# Altium PCB PCB-sac-xa-4s.pcbdoc
Units mm, origin at the board's own origin, x right, y up, seen from the top; angles counter-clockwise.
Board outline 48.9 x 43.1 mm, 2 copper layers (Top Layer, Bottom Layer); 87 components, 52 nets, 582 pads, 32 vias.
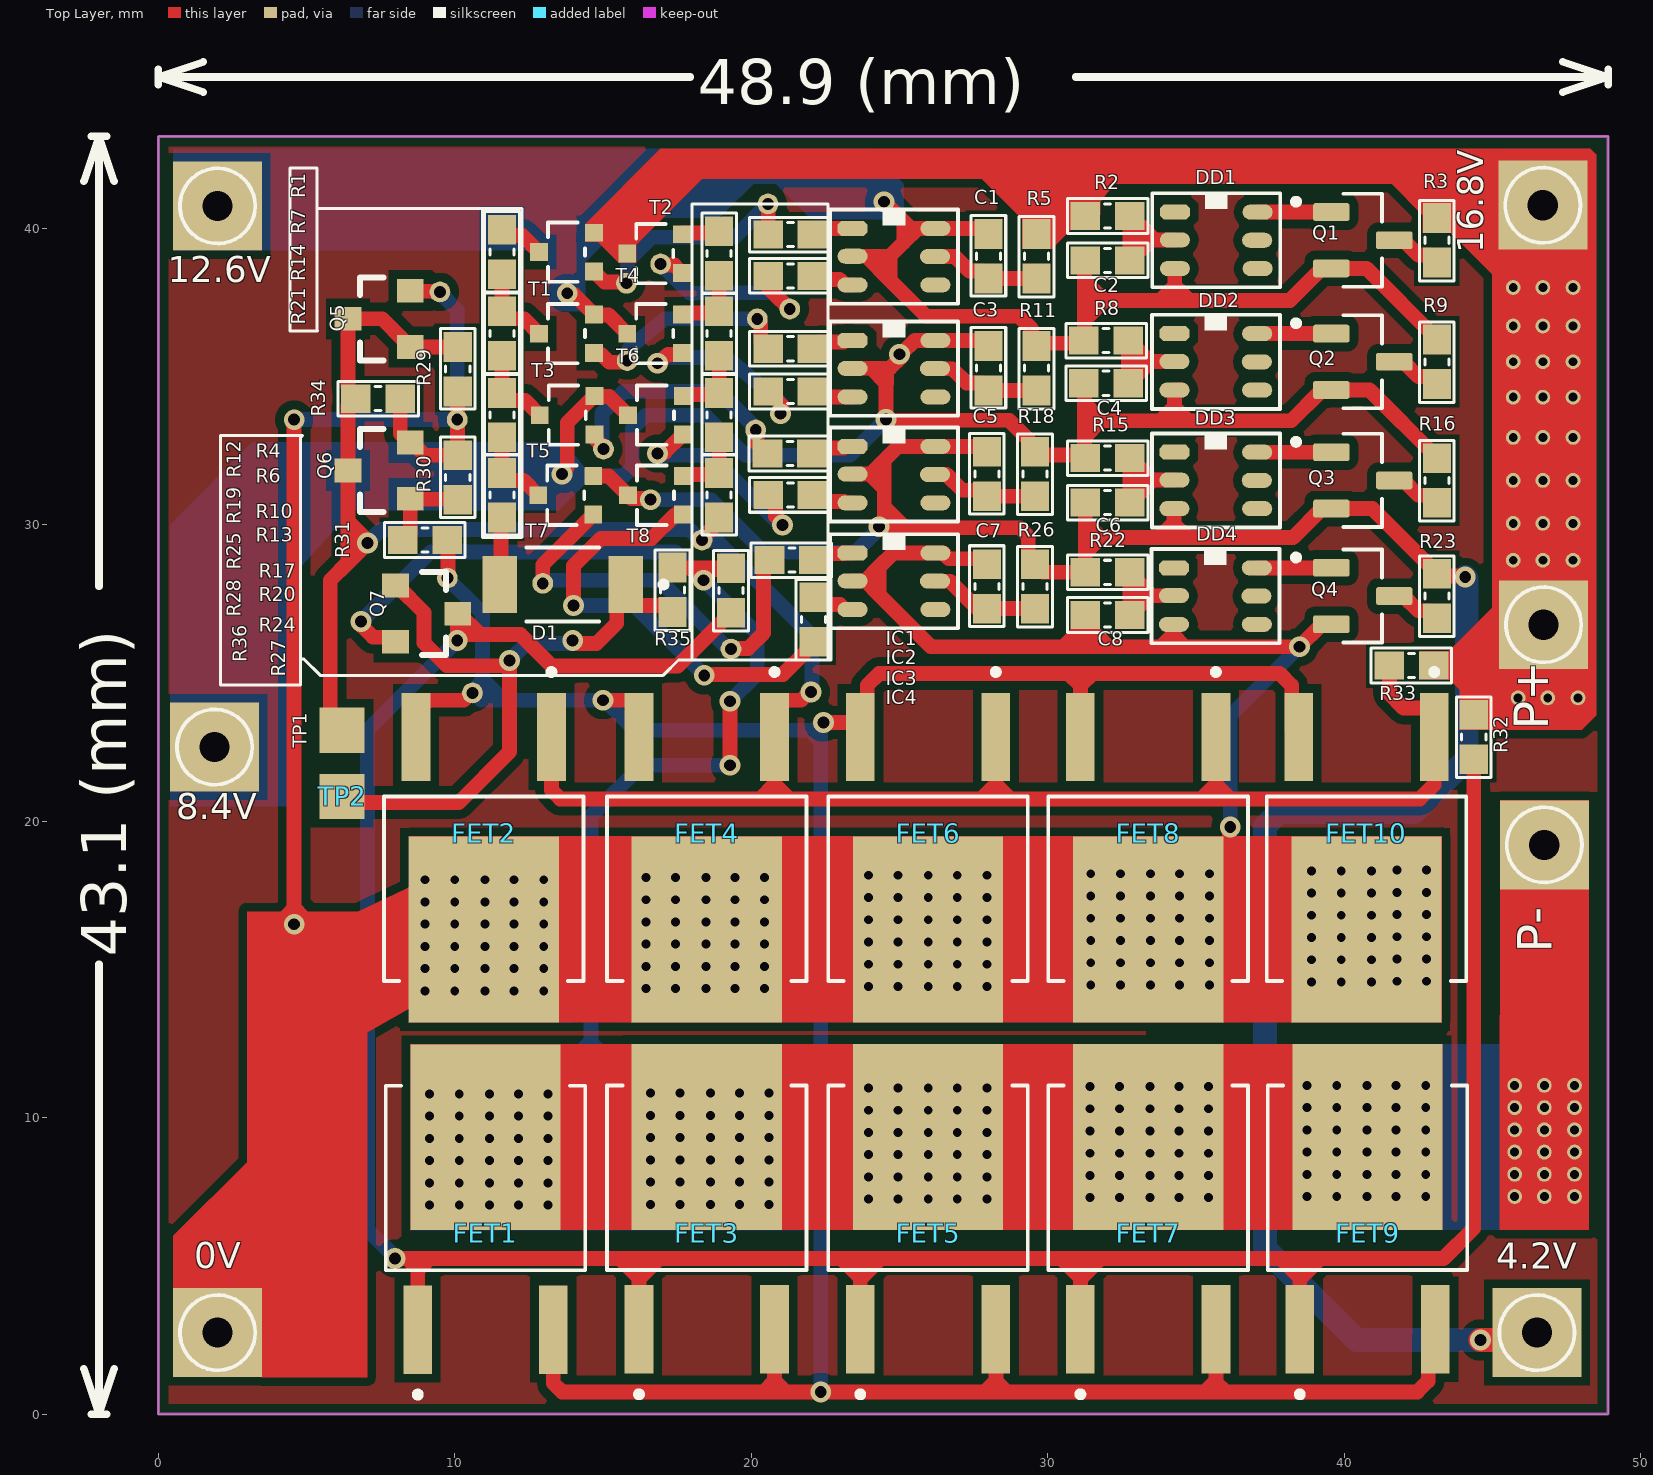
[diagram p0: Top Layer view]
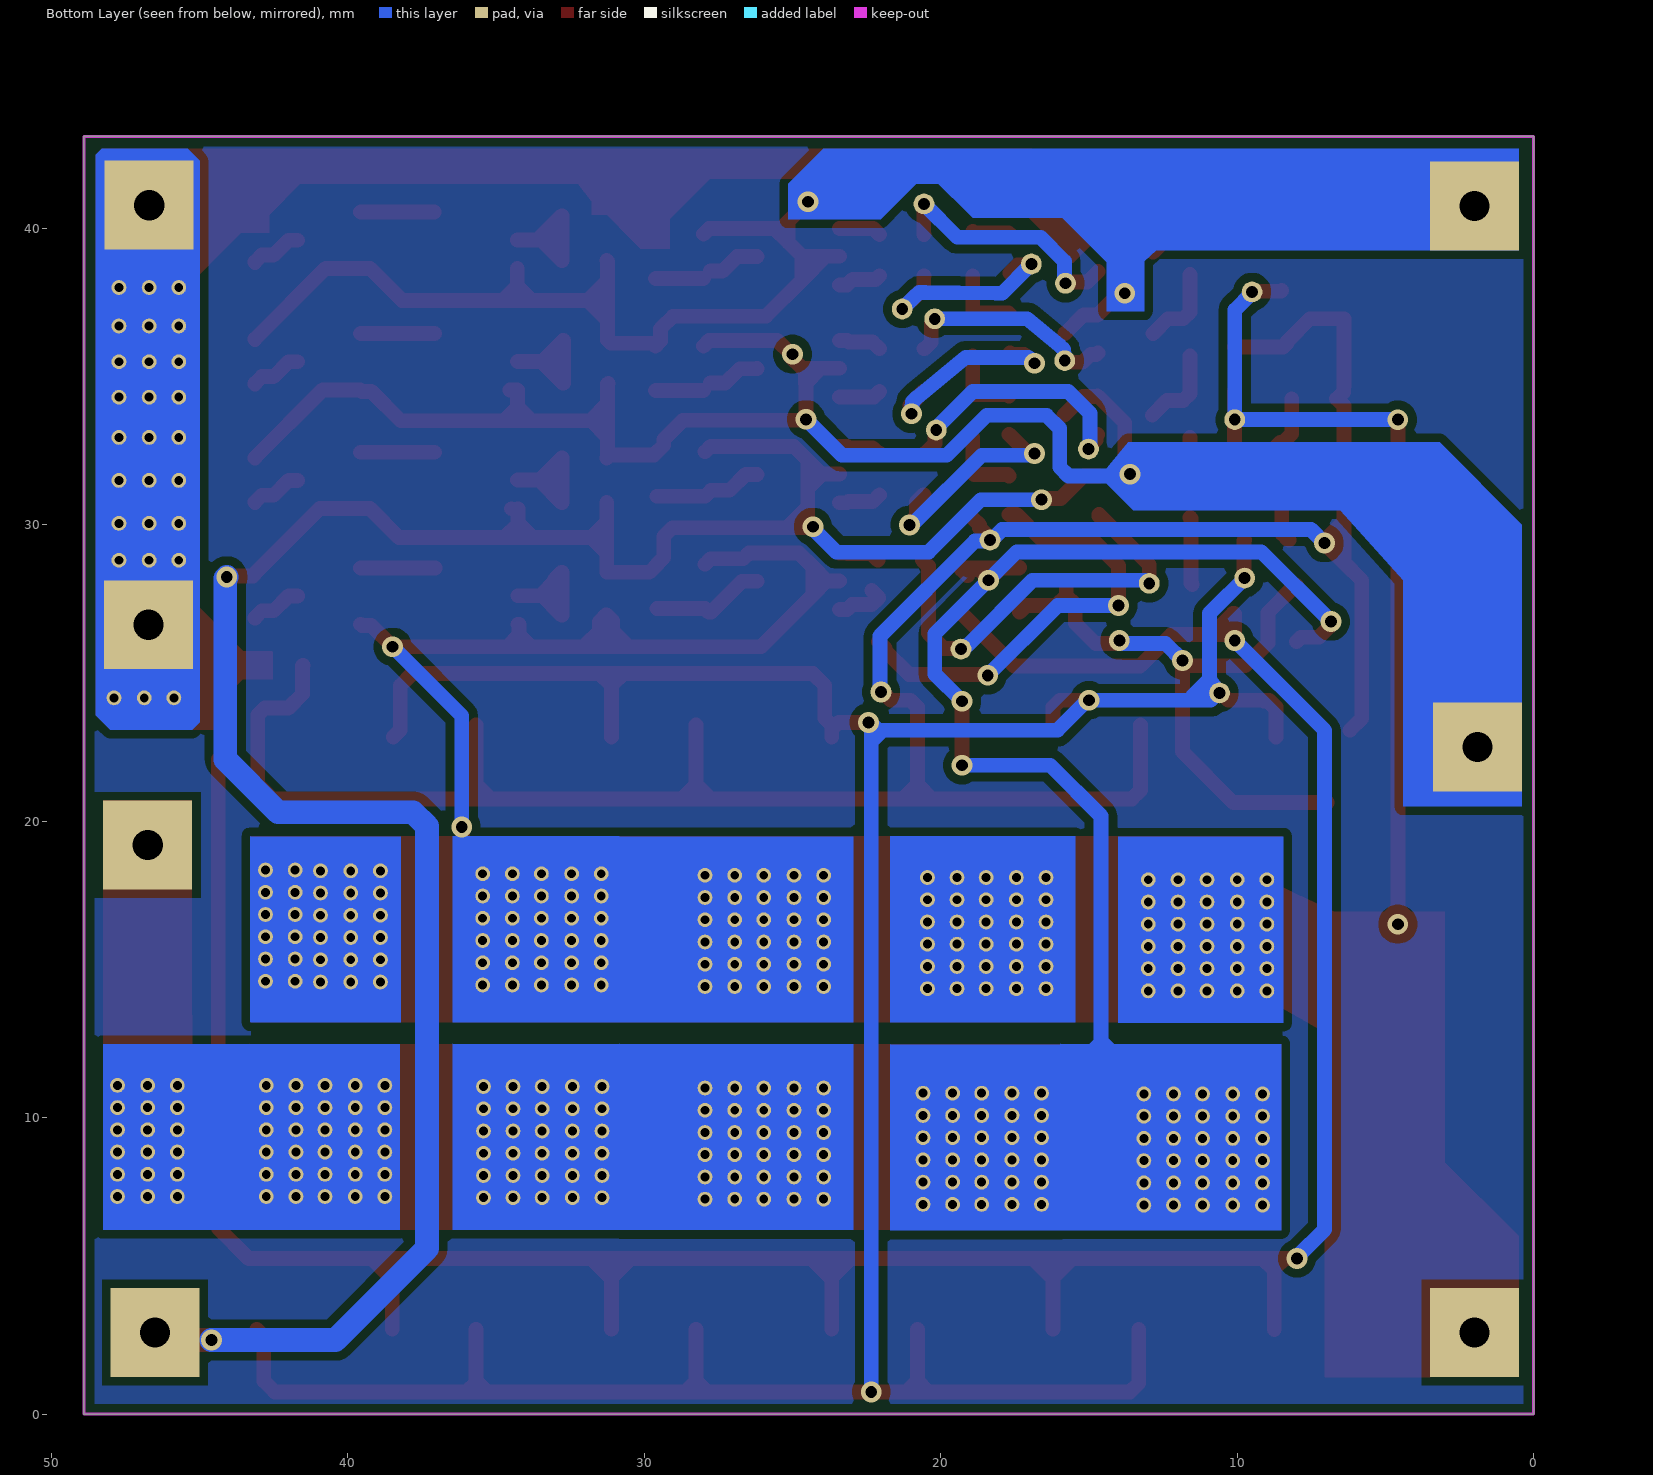
[diagram p1: Bottom Layer view, seen from below]
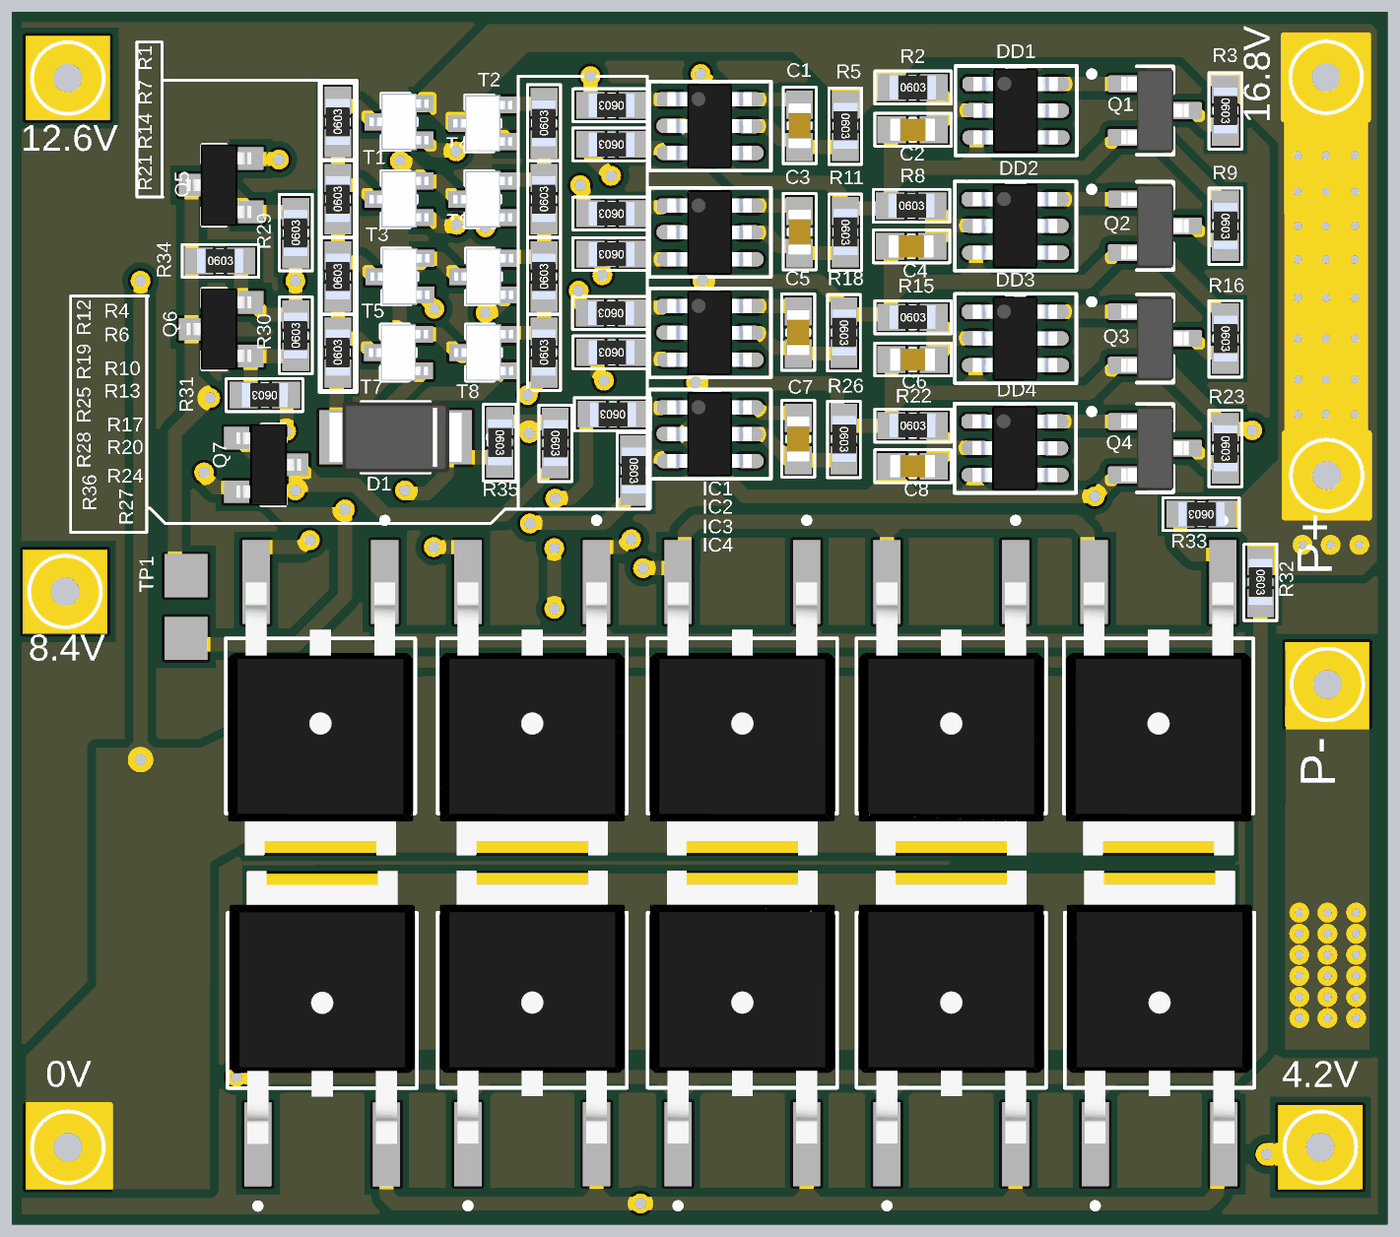
[diagram p2: 3D render of the assembled board from above, using the file's embedded part models]

## Layer stack, top to bottom
Top Solder: solder mask 0.0102, Solder Resist, Dk 3.5
Top Layer: signal copper 0.0356
Dielectric 1: dielectric 0.32, FR-4, Dk 4.8
Bottom Layer: signal copper 0.0356
Bottom Solder: solder mask 0.0102, Solder Resist, Dk 3.5

## Board outline
0,0 48.9,0 48.9,43.1 0,43.1

## Design rules (kind name [scope] priority, off if disabled: settings)
Clearance [All] p1: gap=0.254 ignorepadtopadclearanceinfootprint=FALSE except(0: Arc-Hole Track-Hole SMDPad-Hole THPad-Hole Via-Hole Fill-Hole Poly-Hole Region-Hole Text-Hole; 0.3: Arc-Fill Arc-Poly Arc-Region Track-Fill Track-Poly Track-Region SMDPad-Fill SMDPad-Poly SMDPad-Region THPad-Fill THPad-Poly THPad-Region Via-Fill Via-Poly Via-Region Fill-Fill Fill-Poly Fill-Region Poly-Poly Poly-Region Region-Region)
ComponentClearance ComponentClearance_1 [All] p1: gap=0.5 collisioncheckmode=3 verticalgap=0.254 showdistances=FALSE
PolygonConnect [All] p1: connectstyle=Relief reliefconductorwidth=0.254 reliefentries=4 polygonreliefangle="90 Angle" airgapwidth=0.254
RoutingVias [All] p1: holewidth=0.4 width=0.7 viastyle="Through Hole" minholewidth=0.4 minwidth=0.7 maxholewidth=0.4 maxwidth=0.7
SolderMaskExpansion [All] p1: expansion=0.102 istentingtop=FALSE
Width [All] p1: maxlimit=3 minlimit=0.3 preferedwidth=0.5
29 further rules are at their usual default settings.

## Classes and differential pairs
component class "Room Definition 1": C1 DD4 IC4

## Components (designator, comment, footprint, x,y, rotation, side; value= is the part's Value field where it differs from the comment)
0V "5003" KEYSTONE_5003#1 2,2.75 r0 top
4.2V "5003" KEYSTONE_5003#1 46.5,2.75 r0 top
8.4V "5003" KEYSTONE_5003#1 1.9,22.5 r0 top
12.6V "5003" KEYSTONE_5003#1 2,40.75 r0 top
16.8V "5003" KEYSTONE_5003#1 46.7,40.775 r90 top
C1 "C" "tu 0603" 28,39.053 r90 top
C2 "C" "tu 0603" 32.016,38.913 r0 top
C3 "C" "tu 0603" 28,35.278 r90 top
C4 "C" "tu 0603" 31.965,34.769 r0 top
C5 "C" "tu 0603" 27.949,31.707 r90 top
C6 "C" "tu 0603" 32.015,30.744 r0 top
C7 "C" "tu 0603" 27.949,27.917 r90 top
C8 "C" "tu 0603" 32.015,26.954 r0 top
D1 "SS34FSH" SODFL4725X110N 13.643,27.983 r180 top
DD1 "HY2213" SOT23-6 35.796,39.721 r0 top
DD2 "HY2213" SOT23-6 35.781,35.621 r0 top
DD3 "HY2213" SOT23-6 35.781,31.621 r0 top
DD4 "HY2213" SOT23-6 35.766,27.721 r0 top
FET1 "AOD472" PCBComponent_1 11.036,9.34 r0 top
FET2 "AOD472" PCBComponent_1 10.975,16.35 r180 top
FET3 "AOD472" PCBComponent_1 18.5,9.35 r0 top
FET4 "AOD472" PCBComponent_1 18.5,16.35 r180 top
FET5 "AOD472" PCBComponent_1 25.964,9.35 r0 top
FET6 "AOD472" PCBComponent_1 25.964,16.35 r180 top
FET7 "AOD472" PCBComponent_1 33.387,9.35 r0 top
FET8 "AOD472" PCBComponent_1 33.386,16.35 r180 top
FET9 "AOD472" PCBComponent_1 40.787,9.35 r0 top
FET10 "AOD472" PCBComponent_1 40.75,16.35 r180 top
IC1 "DW01A" SOT23-6 24.927,39.17 r0 top
IC2 "DW01A" SOT23-6 24.927,35.39 r0 top
IC3 "DW01A" SOT23-6 24.927,31.82 r0 top
IC4 "DW01A" SOT23-6 24.927,28.22 r0 top
P+ "5003" KEYSTONE_5003#2 46.725,26.625 r90 top (schematic designator PACK+)
P- "5003" KEYSTONE_5003#3 46.75,19.2 r90 top (schematic designator PACK-)
Q1 "BSS138" SOT95P240X111-3N 40.626,39.594 r0 top
Q2 "BSS138" SOT95P240X111-3N 40.626,35.494 r0 top
Q3 "BSS138" SOT95P240X111-3N 40.626,31.494 r0 top
Q4 "BSS138" SOT95P240X111-3N 40.626,27.594 r0 top
Q5 "MMBT5551" SOT23-3 7.5,36.943 r0 top
Q6 "MMBT5551" SOT23-3 7.5,31.825 r0 top
Q7 "MMBT5551" SOT23-3 9,27 r180 top
R1 "R" "tro smd 0603" 11.593,39.193 r90 top
R2 "R" "tro smd 0603" 32.016,40.413 r0 top
R3 "R" "tro smd 0603" 43.126,39.594 r270 top
R4 "R" "tro smd 0603" 21.318,39.783 r180 top
R5 "R" "tro smd 0603" 29.621,39.053 r270 top
R6 "R" "tro smd 0603" 21.318,38.393 r180 top
R7 "R" "tro smd 0603" 11.593,36.443 r90 top
R8 "R" "tro smd 0603" 31.965,36.209 r0 top
R9 "R" "tro smd 0603" 43.126,35.494 r270 top
R10 "R" "tro smd 0603" 21.318,35.933 r180 top
R11 "R" "tro smd 0603" 29.621,35.278 r270 top
R12 "R" "tro smd 0603" 18.918,39.143 r90 top
R13 "R" "tro smd 0603" 21.318,34.493 r180 top
R14 "R" "tro smd 0603" 11.593,33.693 r90 top
R15 "R" "tro smd 0603" 32.015,32.244 r0 top
R16 "R" "tro smd 0603" 43.126,31.494 r270 top
R17 "R" "tro smd 0603" 21.3,32.4 r180 top
R18 "R" "tro smd 0603" 29.57,31.707 r270 top
R19 "R" "tro smd 0603" 18.918,36.443 r90 top
R20 "R" "tro smd 0603" 21.318,31.003 r180 top
R21 "R" "tro smd 0603" 11.593,30.993 r90 top
R22 "R" "tro smd 0603" 32.015,28.394 r0 top
R23 "R" "tro smd 0603" 43.126,27.594 r270 top
R24 "R" "tro smd 0603" 21.368,28.803 r180 top
R25 "R" "tro smd 0603" 18.918,33.693 r90 top
R26 "R" "tro smd 0603" 29.57,27.917 r270 top
R27 "R" "tro smd 0603" 22.1,26.803 r270 top
R28 "R" "tro smd 0603" 18.918,30.993 r90 top
R29 "R" "tro smd 0603" 10.1,35.243 r90 top
R30 "R" "tro smd 0603" 10.1,31.593 r90 top
R31 "R" "tro smd 0603" 9,29.483 r180 top
R32 "R" "tro smd 0603" 44.37,22.84 r270 top
R33 "R" "tro smd 0603" 42.275,25.25 r180 top
R34 "R" "tro smd 0603" 7.41,34.25 r0 top
R35 "R" "tro smd 0603" 17.343,27.803 r270 top
R36 "R" "tro smd 0603" 19.318,27.778 r270 top
T1 "PMST5401" SOT323 13.768,39.193 r90 top
T2 "PMST5401" SOT323 16.743,39.143 r90 top
T3 "PMST5401" SOT323 13.768,36.443 r90 top
T4 "PMST5401" SOT323 16.743,36.443 r90 top
T5 "PMST5401" SOT323 13.793,33.693 r90 top
T6 "PMST5401" SOT323 16.768,33.693 r90 top
T7 "PMST5401" SOT323 13.743,30.993 r90 top
T8 "PMST5401" SOT323 16.768,30.993 r90 top
TP1 "TP?" TP 6.2,23.064 r0 top
TP2 "TP?" TP 6.2,20.836 r90 top

## Footprints (in the part's own frame and the unit in brackets; to place one, negate y for a bottom-side part, rotate by r counter-clockwise, add the part's x,y. Pads: shape width x height; smd on the part's side, far side on the other; paste and mask are expansions set on the pad)
KEYSTONE_5003#1 [mm]
  rect 3x3 hole 1.02: TP(0,0)
  silkscreen extent -1.27,-1.27 1.27,1.27
KEYSTONE_5003#2 [mm]
  rect 3x3 hole 1.02: PACK+(0,0)
  silkscreen extent -1.27,-1.27 1.27,1.27
KEYSTONE_5003#3 [mm]
  rect 3x3 hole 1.02: PACK-(0,0)
  silkscreen extent -1.27,-1.27 1.27,1.27
PCBComponent_1 [mm]
  rect 0.97x2.98 smd: 1(-2.286,-6.49) 3(2.286,-6.49)
  rect 5.07x6.27 smd paste-4: 2(0,0)
  silkscreen extent -3.37,-8.78 3.37,1.74, body extent -3.29,-6.47 3.29,3.23, height 2.3
SODFL4725X110N [mm]
  rect 1.17x1.92 smd: A(2.125,0) C(-2.125,0)
  silkscreen extent -3.5,-1.25 1.22,1.25, body extent -2.35,-1.25 2.35,1.25, height 1.1
SOT23-3 [mm]
  rect 0.9x0.8 smd: 1(1,-0.95) 2(1,0.95) 3(-1.1,0)
  silkscreen extent -0.7,-1.4 0.1,1.4, body extent -1.28,-1.45 1.02,1.45, height 1
SOT23-6 [mil]
  oct 40x20 smd: 1(-59.41,32.4)
  oval 40x20 smd: 2(-59.41,-4.6) 3(-59.41,-42.6) 4(50.59,-42.6) 5(50,-5) 6(50.59,32.4)
  silkscreen extent -89,-68 81,57, body extent -64,-64 54,54, height 51
SOT95P240X111-3N [mm]
  rrect25% 1.23x0.6 smd: 1(-1.06,0.95) 2(-1.06,-0.95) 3(1.06,0)
  silkscreen extent -2.35,-1.57 0.65,1.57, body extent -1.2,-1.46 1.2,1.46, height 1.13
SOT323 [mm]
  rect 0.6x0.6 smd: 1(-0.65,-0.925) 2(0.65,-0.925) 3(0,0.925)
  silkscreen extent -1,-0.63 1,0.63, body extent -1,-1.05 1,1.05, height 0.9
TP [mil]
  rect 60x60 smd: 1(0,0)
"tro smd 0603" [mm] "Chip Capacitor, 2-Leads, Body 1,60x0,80mm, IPC Medium Density"
  rect 1x0.95 smd mask+0.076: 1(-0.75,0) 2(0.75,0)
  silkscreen extent -1.35,-0.58 1.37,0.58, body extent -0.82,-0.42 0.82,0.43, height 0.44
"tu 0603" [mm] "Chip Capacitor, 2-Leads, Body 1,60x0,80mm, IPC Medium Density"
  rect 1x0.95 smd mask+0.076: 1(-0.75,0) 2(0.75,0)
  silkscreen extent -1.35,-0.58 1.37,0.58, body extent -0.8,-0.4 0.8,0.4, height 0.9

## Part data
0V 4.2V 8.4V 12.6V 16.8V P+ P-: Package=None, Availability=Unavailable, MF="{'manufacturer': u'Keystone Electronics'}", MP=5003, Price=None
C1 C2 C3 C4 C5 C6 C7 C8: library part "Tu 0603 105 50V 10%", "Dán", Chung_Loai=Dán, Don_Vi=Con, Ma_Hang=MH004569, So_Chan=2, Ten_Linh_Kien="Tụ 0603 105-1uF 50V 10%"
D1: "3A, 40V, Schottky Rectifier", Package="SOD-128-2 Taiwan Semiconductor", Availability="In Stock", Check_prices=https://www.snapeda.com/parts/SS34FSH/Taiwan+Semiconductor/view-part/?ref=eda, MF="Taiwan Semiconductor", MP=SS34FSH, Price=None, SnapEDA_Link=https://www.snapeda.com/parts/SS34FSH/Taiwan+Semiconductor/view-part/?ref=snap
DD1 DD2 DD3 DD4: "1 Cell Li-ion/Polymer Battery Charge Balance IC"
IC1 IC2 IC3 IC4: "One Cell Lithium-ion/Polymer Battery Protection IC", Package="SOT-23-6 Fortune Semiconductor", Availability="Not in stock", Check_prices=https://www.snapeda.com/parts/DW01A/Fortune+Semiconductor/view-part/?ref=eda, MF="Fortune Semiconductor", MP=DW01A, Price=None, SnapEDA_Link=https://www.snapeda.com/parts/DW01A/Fortune+Semiconductor/view-part/?ref=snap
Q1 Q2 Q3 Q4: "N-Channel 50V 220mA (Ta) 360mW (Ta) Surface Mount SOT-23-3", Package="SOT-23 ON Semiconductor", Availability=Good, Check_prices=https://www.snapeda.com/parts/BSS138/ON%20Semiconductor/view-part/4794929/?ref=eda, MF="ON Semiconductor", MP=BSS138, Price=None, Purchase-URL=https://pricing.snapeda.com/search/part/BSS138/?ref=eda, SnapEDA_Link=https://www.snapeda.com/parts/BSS138/ON%20Semiconductor/view-part/4794929/?ref=snap
Q5 Q6 Q7: "Bipolar _BJT_ Transistor NPN 160V 600mA 225mW Surface Mount SOT-23-3 _TO-236_", Package="SOT-23-3 MCC", Availability=Unavailable, MF="ON Semiconductor", MP=MMBT5551, Price=None, SnapEDA_Link=https://www.snapeda.com/parts/MMBT5551/ON%20Semiconductor/view-part/2760073/?ref=snap
R1 R2 R3 R4 R5 R6 R7 R8 R9 R10 R11 R12 R13 R14 R15 R16 R17 R18 R19 R20 R21 R22 R23 R24 R25 R26 R27 R28 R29 R30 R31 R32 R33 R34 R35 R36: library part "Tro 0603 5% 100R", "Dán", Chung_Loai=Dán, Don_Vi=Con, Ma_Hang=MH006315, So_Chan=2, Ten_Linh_Kien="Trở 0603 5% 100R"
T1 T2 T3 T4 T5 T6 T7 T8: "<p> <author>AAL Eindhoven MK</author><hr><p> <img src=\"http://www.nxp.com/img/NXP_logo.png\">", Package=None, Availability=Unavailable, MP=PMST5401, Price=None

## Free pads (board coordinates)
  round 0.7 hole 0.4: 2(9.5,37.85) 2(9.75,28.199) 2(10.084,33.543) 2(10.596,24.324) 2(12.968,28.02) 2(15.018,32.55) 2(15.793,38.143) 2(15.818,35.533) 2(16.945,38.793) 2(18.338,29.483) 2(19.318,25.803) 2(20.151,33.193) 2(20.205,36.943) 2(20.564,40.817) 2(21.3,37.275)
  round 0.5 hole 0.3: 3(9,14.275) 3(9.15,7.05) 3(12,14.275) 3(12.15,7.05) 3(13,14.275) 3(13.15,7.05) 3(16.45,14.35) 3(16.6,7.075) 3(19.45,14.35) 3(19.6,7.075) 3(20.45,14.35) 3(20.6,7.075) 3(23.95,7.25) 3(23.95,14.425) 3(26.95,7.25) 3(26.95,14.425) 3(27.95,7.25) 3(27.95,14.425) 3(31.425,7.3) 3(31.45,14.475) 3(34.425,7.3) 3(34.45,14.475) 3(35.425,7.3) 3(35.45,14.475) 3(38.75,7.338) 3(38.9,14.575) 3(41.75,7.338) 3(41.775,14.6) 3(42.75,7.338) 3(45.75,7.338) 4(10,14.275) 4(10.15,7.05) 4(17.45,14.35) 4(17.6,7.075) 4(24.95,7.25) 4(24.95,14.425) 4(32.425,7.3) 4(32.45,14.475) 4(39.75,7.338) 4(39.9,14.575) 4(42.775,14.6) 4(46.75,7.338) 5(11.02,14.275) 5(11.17,7.05) 5(18.47,14.35) 5(18.62,7.075) 5(25.97,7.25) 5(25.97,14.425) 5(33.445,7.3) 5(33.47,14.475) 5(40.77,7.338) 5(40.92,14.575) 5(47.77,7.338) 6(9,15.025) 6(9.15,7.8) 6(12,15.025) 6(12.15,7.8) 6(13,15.025) 6(13.15,7.8) 6(16.45,15.1) 6(16.6,7.825) 6(19.45,15.1) 6(19.6,7.825) 6(20.45,15.1) 6(20.6,7.825) 6(23.95,8) 6(23.95,15.175) 6(26.95,8) 6(26.95,15.175) 6(27.95,8) 6(27.95,15.175) 6(31.425,8.05) 6(31.45,15.225) 6(34.425,8.05) 6(34.45,15.225) 6(35.425,8.05) 6(35.45,15.225) 6(38.75,8.088) 6(38.9,15.325) 6(41.75,8.088) 6(41.775,15.35) 6(42.75,8.088) 6(45.75,8.088) 7(10,15.025) 7(10.15,7.8) 7(17.45,15.1) 7(17.6,7.825) 7(24.95,8) 7(24.95,15.175) 7(32.425,8.05) 7(32.45,15.225) 7(39.75,8.088) 7(39.9,15.325) 7(42.775,15.35) 7(46.75,8.088) 8(11.02,15.025) 8(11.17,7.8) 8(18.47,15.1) 8(18.62,7.825) 8(25.97,8) 8(25.97,15.175) 8(33.445,8.05) 8(33.47,15.225) 8(40.77,8.088) 8(40.92,15.325) 8(47.77,8.088) 9(9,15.775) 9(9.15,8.55) 9(12,15.775) 9(12.15,8.55) 9(13,15.775) 9(13.15,8.55) 9(16.45,15.85) 9(16.6,8.575) 9(19.45,15.85) 9(19.6,8.575) 9(20.45,15.85) 9(20.6,8.575) 9(23.95,8.75) 9(23.95,15.925) 9(26.95,8.75) 9(26.95,15.925) 9(27.95,8.75) 9(27.95,15.925) 9(31.425,8.8) 9(31.45,15.975) 9(34.425,8.8) 9(34.45,15.975) 9(35.425,8.8) 9(35.45,15.975) 9(38.75,8.838) 9(38.9,16.075) 9(41.75,8.838) 9(41.775,16.1) 9(42.75,8.838) 9(45.75,8.838) 10(10,15.775) 10(10.15,8.55) 10(17.45,15.85) 10(17.6,8.575) 10(24.95,8.75) 10(24.95,15.925) 10(32.425,8.8) 10(32.45,15.975) 10(39.75,8.838) 10(39.9,16.075) 10(42.775,16.1) 10(46.75,8.838) 11(11.02,15.775) 11(11.17,8.55) 11(18.47,15.85) 11(18.62,8.575) 11(25.97,8.75) 11(25.97,15.925) 11(33.445,8.8) 11(33.47,15.975) 11(40.77,8.838) 11(40.92,16.075) 11(47.77,8.838) 12(9,16.525) 12(9.15,9.3) 12(12,16.525) 12(12.15,9.3) 12(13,16.525) 12(13.15,9.3) 12(16.45,16.6) 12(16.6,9.325) 12(19.45,16.6) 12(19.6,9.325) 12(20.45,16.6) 12(20.6,9.325) 12(23.95,9.5) 12(23.95,16.675) 12(26.95,9.5) 12(26.95,16.675) 12(27.95,9.5) 12(27.95,16.675) 12(31.425,9.55) 12(31.45,16.725) 12(34.425,9.55) 12(34.45,16.725) 12(35.425,9.55) 12(35.45,16.725) 12(38.75,9.588) 12(38.9,16.825) 12(41.75,9.588) 12(41.775,16.85) 12(42.75,9.588) 12(45.75,9.588) 13(10,16.525) 13(10.15,9.3) 13(17.45,16.6) 13(17.6,9.325) 13(24.95,9.5) 13(24.95,16.675) 13(32.425,9.55) 13(32.45,16.725) 13(39.75,9.588) 13(39.9,16.825) 13(42.775,16.85) 13(46.75,9.588) 14(11.02,16.525) 14(11.17,9.3) 14(18.47,16.6) 14(18.62,9.325) 14(25.97,9.5) 14(25.97,16.675) 14(33.445,9.55) 14(33.47,16.725) 14(40.77,9.588) 14(40.92,16.825) 14(47.77,9.588) 15(9,17.275) 15(9,18.025) 15(9.15,10.05) 15(9.15,10.8) 15(12,17.275) 15(12,18.025) 15(12.15,10.05) 15(12.15,10.8) 15(13,17.275) 15(13,18.025) 15(13.15,10.05) 15(13.15,10.8) 15(16.45,17.35) 15(16.45,18.1) 15(16.6,10.075) 15(16.6,10.825) 15(19.45,17.35) 15(19.45,18.1) 15(19.6,10.075) 15(19.6,10.825) 15(20.45,17.35) 15(20.45,18.1) 15(20.6,10.075) 15(20.6,10.825) 15(23.95,10.25) 15(23.95,11) 15(23.95,17.425) 15(23.95,18.175) 15(26.95,10.25) 15(26.95,11) 15(26.95,17.425) 15(26.95,18.175) 15(27.95,10.25) 15(27.95,11) 15(27.95,17.425) 15(27.95,18.175) 15(31.425,10.3) 15(31.425,11.05) 15(31.45,17.475) 15(31.45,18.225) 15(34.425,10.3) 15(34.425,11.05) 15(34.45,17.475) 15(34.45,18.225) 15(35.425,10.3) 15(35.425,11.05) 15(35.45,17.475) 15(35.45,18.225) 15(38.75,10.338) 15(38.75,11.088) 15(38.9,17.575) 15(38.9,18.325) 15(41.75,10.338) 15(41.75,11.088) 15(41.775,17.6) 15(41.775,18.35) 15(42.75,10.338) 15(42.75,11.088) 15(45.7,28.8) 15(45.7,30.044) 15(45.7,31.494) 15(45.7,32.944) 15(45.7,34.3) 15(45.7,35.494) 15(45.7,36.7) 15(45.7,38) 15(45.75,10.338) 15(45.75,11.088) 15(45.866,24.159) 16(10,17.275) 16(10,18.025) 16(10.15,10.05) 16(10.15,10.8) 16(17.45,17.35) 16(17.45,18.1) 16(17.6,10.075) 16(17.6,10.825) 16(24.95,10.25) 16(24.95,11) 16(24.95,17.425) 16(24.95,18.175) 16(32.425,10.3) 16(32.425,11.05) 16(32.45,17.475) 16(32.45,18.225) 16(39.75,10.338) 16(39.75,11.088) 16(39.9,17.575) 16(39.9,18.325) 16(42.775,17.6) 16(42.775,18.35) 16(46.7,28.8) 16(46.7,30.044) 16(46.7,31.494) 16(46.7,32.944) 16(46.7,34.3) 16(46.7,35.494) 16(46.7,36.7) 16(46.7,38) 16(46.75,10.338) 16(46.75,11.088) 16(46.866,24.159) 17(11.02,17.275) 17(11.02,18.025) 17(11.17,10.05) 17(11.17,10.8) 17(18.47,17.35) 17(18.47,18.1) 17(18.62,10.075) 17(18.62,10.825) 17(25.97,10.25) 17(25.97,11) 17(25.97,17.425) 17(25.97,18.175) 17(33.445,10.3) 17(33.445,11.05) 17(33.47,17.475) 17(33.47,18.225) 17(40.77,10.338) 17(40.77,11.088) 17(40.92,17.575) 17(40.92,18.325) 17(47.72,28.8) 17(47.72,30.044) 17(47.72,31.494) 17(47.72,32.944) 17(47.72,34.3) 17(47.72,35.494) 17(47.72,36.7) 17(47.72,38) 17(47.77,10.338) 17(47.77,11.088) 17(47.886,24.159)

## Via types
v1: diameter 0.7, hole 0.4, Top Layer to Bottom Layer, 32 vias

## Nets (pads, with @x,y where several pads share a name; then routed paths per layer and width w, separated by ;. In a path a pad name is that pad's centre, name@x,y a point inside that pad or via, vN(x,y) a via of type N, cw(c..) or ccw(c..) an arc to the next point about the centre after c; other vN are vias at no path point)
Net0V_TP: 0V.TP C7.2 C8.1 DD4.3 FET2.2 FET4.2 FET6.2 FET8.2 FET10.2 IC4.2 IC4.6 pad.2@9.5,37.85 pad.2@10.084,33.543 pad.3@9,14.275 pad.3@12,14.275 pad.3@13,14.275 pad.3@16.45,14.35 pad.3@19.45,14.35 pad.3@20.45,14.35 pad.3@23.95,14.425 pad.3@26.95,14.425 pad.3@27.95,14.425 pad.3@31.45,14.475 pad.3@34.45,14.475 pad.3@35.45,14.475 pad.3@38.9,14.575 pad.3@41.775,14.6 pad.4@10,14.275 pad.4@17.45,14.35 pad.4@24.95,14.425 pad.4@32.45,14.475 pad.4@39.9,14.575 pad.4@42.775,14.6 pad.5@11.02,14.275 pad.5@18.47,14.35 pad.5@25.97,14.425 pad.5@33.47,14.475 pad.5@40.92,14.575 pad.6@9,15.025 pad.6@12,15.025 pad.6@13,15.025 pad.6@16.45,15.1 pad.6@19.45,15.1 pad.6@20.45,15.1 pad.6@23.95,15.175 pad.6@26.95,15.175 pad.6@27.95,15.175 pad.6@31.45,15.225 pad.6@34.45,15.225 pad.6@35.45,15.225 pad.6@38.9,15.325 pad.6@41.775,15.35 pad.7@10,15.025 pad.7@17.45,15.1 pad.7@24.95,15.175 pad.7@32.45,15.225 pad.7@39.9,15.325 pad.7@42.775,15.35 pad.8@11.02,15.025 pad.8@18.47,15.1 pad.8@25.97,15.175 pad.8@33.47,15.225 pad.8@40.92,15.325 pad.9@9,15.775 pad.9@12,15.775 pad.9@13,15.775 pad.9@16.45,15.85 pad.9@19.45,15.85 pad.9@20.45,15.85 pad.9@23.95,15.925 pad.9@26.95,15.925 pad.9@27.95,15.925 pad.9@31.45,15.975 pad.9@34.45,15.975 pad.9@35.45,15.975 pad.9@38.9,16.075 pad.9@41.775,16.1 pad.10@10,15.775 pad.10@17.45,15.85 pad.10@24.95,15.925 pad.10@32.45,15.975 pad.10@39.9,16.075 pad.10@42.775,16.1 pad.11@11.02,15.775 pad.11@18.47,15.85 pad.11@25.97,15.925 pad.11@33.47,15.975 pad.11@40.92,16.075 pad.12@9,16.525 pad.12@12,16.525 pad.12@13,16.525 pad.12@16.45,16.6 pad.12@19.45,16.6 pad.12@20.45,16.6 pad.12@23.95,16.675 pad.12@26.95,16.675 pad.12@27.95,16.675 pad.12@31.45,16.725 pad.12@34.45,16.725 pad.12@35.45,16.725 pad.12@38.9,16.825 pad.12@41.775,16.85 pad.13@10,16.525 pad.13@17.45,16.6 pad.13@24.95,16.675 pad.13@32.45,16.725 pad.13@39.9,16.825 pad.13@42.775,16.85 pad.14@11.02,16.525 pad.14@18.47,16.6 pad.14@25.97,16.675 pad.14@33.47,16.725 pad.14@40.92,16.825 pad.15@9,17.275 pad.15@9,18.025 pad.15@12,17.275 pad.15@12,18.025 pad.15@13,17.275 pad.15@13,18.025 pad.15@16.45,17.35 pad.15@16.45,18.1 pad.15@19.45,17.35 pad.15@19.45,18.1 pad.15@20.45,17.35 pad.15@20.45,18.1 pad.15@23.95,17.425 pad.15@23.95,18.175 pad.15@26.95,17.425 pad.15@26.95,18.175 pad.15@27.95,17.425 pad.15@27.95,18.175 pad.15@31.45,17.475 pad.15@31.45,18.225 pad.15@34.45,17.475 pad.15@34.45,18.225 pad.15@35.45,17.475 pad.15@35.45,18.225 pad.15@38.9,17.575 pad.15@38.9,18.325 pad.15@41.775,17.6 pad.15@41.775,18.35 pad.16@10,17.275 pad.16@10,18.025 pad.16@17.45,17.35 pad.16@17.45,18.1 pad.16@24.95,17.425 pad.16@24.95,18.175 pad.16@32.45,17.475 pad.16@32.45,18.225 pad.16@39.9,17.575 pad.16@39.9,18.325 pad.16@42.775,17.6 pad.16@42.775,18.35 pad.17@11.02,17.275 pad.17@11.02,18.025 pad.17@18.47,17.35 pad.17@18.47,18.1 pad.17@25.97,17.425 pad.17@25.97,18.175 pad.17@33.47,17.475 pad.17@33.47,18.225 pad.17@40.92,17.575 pad.17@40.92,18.325 Q4.2 Q5.2 Q6.2 R29.1 R30.2 R34.2 | length 71.7
  Top Layer w0.5: v1(4.582,16.525) v1(4.582,33.543) ; R34.2 8.16,33.065 8.45,32.775 Q6.2 8.55,32.775 8.982,32.343 R30.2 10.092,32.351 10.092,33.535 10.084,33.543 10.092,33.551 10.092,34.485 R29.1 ; Q5.2 8.522,37.871 9.479,37.871 pad.2@9.5,37.85 ; IC4.2 IC4.2@23.842,28.103 ; C7.2 27.765,28.851 26.66,28.851 26.468,29.043 IC4.6 26.21,29.041 24.78,29.041 24.311,28.572 ; 30.532,25.881 31.072,26.421 ; 30.694,26.027 30.547,25.881 ; 31.072,26.405 31.072,26.76 C8.1 31.215,26.904 31.215,26.405 ; C8.1@31.29,26.954 31.515,26.729 31.515,26.467 31.249,26.2 31.249,25.881 ; 31.491,26.442 32.052,25.881 ; DD4.3 34.228,26.639 34.224,26.635 34.224,26.285 ; FET8.2@35.45,18.225 36.12,18.895 36.12,19.762 v1(36.158,19.8) ; Q4.2 39.516,26.594 39.201,26.594 v1(38.488,25.881) 34.628,25.881 ; IC4.2@23.842,28.103 24.311,28.572 ; IC4.2@23.842,28.103 24.311,27.634 ; 24.311,27.634 26.064,25.881 30.547,25.881 ; 24.311,27.634 24.311,28.572 ; 30.547,25.881 31.249,25.881 ; 31.249,25.881 33.82,25.881 ; 33.82,25.881 34.076,25.881 ; 33.82,25.881 34.139,26.199 ; 34.076,25.881 34.136,26.187 34.139,26.199 ; 34.076,25.881 34.628,25.881 ; 34.139,26.199 34.224,26.285 ; 34.224,26.285 34.628,25.881
  Bottom Layer w0.5: v1(4.582,33.543) 10.084,33.543 10.084,37.238 9.5,37.822 pad.2@9.5,37.85 ; v1(36.158,19.8) 36.158,23.55 v1(38.488,25.881)
Net4.2V_TP: 4.2V.TP C5.2 C6.1 DD3.3 IC3.2 IC3.6 Q3.2 R22.1 R23.1 R26.1 T7.2 T8.3 | length 86.8
  Top Layer w0.5: T7.2 15.193,31.643 T8.3 15.955,30.881 16.565,30.881 v1(16.603,30.843) ; C5.2 27.765,32.641 24.954,32.641 24.486,32.173 ; C6.1 31.265,30.095 ; DD3.3 34.258,30.539 34.254,30.535 34.254,30.037 ; DD3.3@34.48,30.539 DD3.3@34.483,30.535 ; v1(44.081,28.232) 44.043,28.271 43.2,28.271 R23.1 43.126,28.369 40.951,30.544 Q3.2 39.251,30.544 38.276,29.569 34.722,29.569 ; 4.2V.TP@46.25,2.5 4.2V.TP ; 24.486,30.603 24.486,31.207 ; 24.486,30.603 24.486,30.157 24.311,29.983 v1(24.311,29.928) 24.342,29.898 25.191,29.898 ; 24.486,30.603 25.191,29.898 ; 24.486,31.207 24.486,32.173 ; 24.486,31.207 23.991,31.702 23.42,31.702 IC3.2 23.42,31.705 24.018,31.705 24.486,32.173 ; 25.191,29.898 29.052,29.898 29.345,29.605 29.345,28.892 R26.1 29.57,28.642 29.795,28.417 29.82,28.417 29.844,28.394 R22.1 31.265,29.043 ; 31.265,29.043 31.791,29.569 ; 31.265,29.043 31.265,30.095 ; 31.265,30.095 31.791,29.569 ; 31.791,29.569 33.756,29.569 ; 33.756,29.569 34.722,29.569 ; 33.756,29.569 34.239,30.052 34.254,30.037 ; 34.254,30.037 34.722,29.569
  Top Layer w0.8: v1(44.6,2.5) 4.2V.TP@46.25,2.5
  Bottom Layer w0.5: v1(16.603,30.843) 18.645,30.843 20.417,29.072 23.516,29.072 v1@24.342,29.898
  Bottom Layer w0.8: v1(44.081,28.232) 44.131,28.182 44.131,22.081 42.35,20.3 37.798,20.3 37.329,19.831 37.329,5.592 40.421,2.5 v1(44.6,2.5)
Net8.4V_TP: 8.4V.TP C3.2 C4.1 DD2.3 IC2.2 IC2.6 Q2.2 R15.1 R16.1 R18.1 T5.2 T6.3 | length 52.7
  Top Layer w0.5: v1(13.619,31.705) 13.619,31.759 13.793,31.933 13.793,33.432 14.654,34.293 14.668,34.293 T5.2 14.738,34.323 15.213,34.323 T6.3 ; IC2.2 24.047,35.274 ; v1@25.065,35.685 25.065,35.761 25.516,36.212 IC2.6@26.21,36.212 ; v1@25.076,35.674 24.676,35.274 ; IC2.6 IC2.6@26.21,36.212 ; C3.2 27.816,36.212 IC2.6@26.21,36.212 ; R18.1 R18.1@29.677,32.35 ; C4.1 31.24,34.744 31.24,34.087 ; R15.1 R15.1@31.24,32.269 ; DD2.3@34.528,34.535 34.524,34.539 DD2.3 34.272,33.979 ; 34.75,33.506 34.745,33.506 ; R16.1 43.126,32.269 40.851,34.544 Q2.2 39.516,34.494 39.201,34.494 38.214,33.506 34.745,33.506 ; 24.047,35.274 24.676,35.274 ; 24.047,35.274 24.543,34.778 ; 24.543,34.778 v1(24.543,33.552) 24.571,33.524 28.695,33.524 29.345,32.874 29.345,32.682 R18.1@29.677,32.35 ; 24.543,34.778 24.571,34.778 24.571,35.169 24.676,35.274 ; R18.1@29.677,32.35 31.159,32.35 R15.1@31.24,32.269 ; R15.1@31.24,32.269 31.24,32.955 ; 31.24,32.955 31.24,34.087 ; 31.24,32.955 31.791,33.506 ; 31.24,34.087 31.791,33.536 31.791,33.506 ; 31.791,33.506 33.8,33.506 ; 33.8,33.506 34.239,33.506 ; 33.8,33.506 34.272,33.979 ; 34.239,33.506 34.745,33.506 ; 34.239,33.506 34.272,33.54 34.272,33.979 ; 34.272,33.979 34.745,33.506
  Bottom Layer w0.5: v1(13.619,31.705) 13.657,31.666 13.798,31.666 13.822,31.643 15.693,31.643 15.986,31.936 15.986,33.243 16.436,33.693 18.443,33.693 19.797,32.339 23.33,32.339 v1(24.543,33.552)
  other v1: 25,35.75
Net12.6V_TP: 12.6V.TP C1.2 C2.1 DD1.3 IC1.2 IC1.6 Q1.2 R8.1 R9.1 R11.1 T3.2 T4.3 | length 40
  Top Layer w0.5: v1(13.793,37.808) 13.831,37.77 14.016,37.77 T3.2 14.713,37.073 15.188,37.073 T4.3 ; IC1.2 IC1.2@23.876,39.053 ; v1(24.48,40.894) 25.145,40.229 ; C1.2 27.812,39.991 25.614,39.991 ; C2.1 31.241,38.888 31.241,38.224 ; DD1.3 34.287,38.048 ; R9.1 43.126,36.269 40.756,38.639 39.571,38.639 Q1.2 39.251,38.644 38.168,37.561 34.75,37.561 ; IC1.2@23.876,39.053 24.676,39.053 ; IC1.2@23.876,39.053 24.676,38.253 ; 24.676,38.253 24.676,39.053 ; 24.676,38.253 25.898,37.032 29.029,37.032 29.456,36.605 29.456,36.193 R11.1 29.711,36.118 31.125,36.118 R8.1 31.241,36.234 31.241,36.897 ; 24.676,39.053 25.145,39.522 ; 25.145,39.522 25.145,40.229 ; 25.145,39.522 25.614,39.991 ; 25.145,40.229 25.383,39.991 25.614,39.991 ; 31.241,36.897 31.241,37.561 ; 31.241,36.897 31.904,37.561 ; 31.241,37.561 31.904,37.561 ; 31.241,37.561 31.241,38.224 ; 31.241,38.224 31.904,37.561 ; 31.904,37.561 33.8,37.561 ; 33.8,37.561 34.287,37.561 ; 33.8,37.561 34.287,38.048 ; 34.287,37.561 34.75,37.561 ; 34.287,37.561 34.287,38.048 ; 34.287,38.048 34.75,37.586 34.75,37.561
Net16.8V_TP: 16.8V.TP P+.PACK+ pad.15@45.7,28.8 pad.15@45.7,30.044 pad.15@45.7,31.494 pad.15@45.7,32.944 pad.15@45.7,34.3 pad.15@45.7,35.494 pad.15@45.7,36.7 pad.15@45.7,38 pad.15@45.866,24.159 pad.16@46.7,28.8 pad.16@46.7,30.044 pad.16@46.7,31.494 pad.16@46.7,32.944 pad.16@46.7,34.3 pad.16@46.7,35.494 pad.16@46.7,36.7 pad.16@46.7,38 pad.16@46.866,24.159 pad.17@47.72,28.8 pad.17@47.72,30.044 pad.17@47.72,31.494 pad.17@47.72,32.944 pad.17@47.72,34.3 pad.17@47.72,35.494 pad.17@47.72,36.7 pad.17@47.72,38 pad.17@47.886,24.159 R2.1 R3.1 R5.1 R32.1 R33.1 T1.2 T2.3
NetC1_1: C1.1 IC1.5 R5.2 | length 3.4
  Top Layer w0.5: IC1.5 26.199,39.041 26.872,39.041 27.36,38.553 C1.1@27.775,38.553 ; C1.1 R5.2
NetC2_2: C2.2 DD1.2 R2.2 | length 5.2
  Top Layer w0.5: DD1.2 34.286,39.606 33.484,39.606 ; 32.766,39.663 R2.2 32.791,40.413 33.484,39.721 33.484,39.606 ; 32.766,39.663 C2.2 32.791,38.913 33.484,39.606 ; 32.766,39.663 33.426,39.663 33.484,39.606
NetC3_1: C3.1 IC2.5 R11.2 | length 3.4
  Top Layer w0.5: IC2.5 26.199,35.262 26.779,35.262 27.263,34.778 C3.1@27.775,34.778 ; C3.1 R11.2
NetC4_2: C4.2 DD2.2 R8.2 | length 5.1
  Top Layer w0.5: DD2.2 34.271,35.506 33.443,35.506 ; 32.715,35.489 R8.2 32.74,36.209 33.443,35.506 ; 32.715,35.489 C4.2 32.74,34.769 33.443,35.472 ; 32.715,35.489 33.427,35.489 33.443,35.472 ; 33.443,35.472 33.443,35.506
NetC5_1: C5.1 IC3.5 R18.2 | length 3.7
  Top Layer w0.5: IC3.5 26.199,31.691 26.585,31.691 27.116,31.16 27.746,31.16 C5.1 R18.2
NetC6_2: C6.2 DD3.2 R15.2 | length 5.2
  Top Layer w0.5: C6.2 C6.2@32.79,30.744 ; 33.529,31.506 33.529,31.482 ; DD3.2 DD3.2 33.549,31.502 33.529,31.482 ; 32.765,31.506 R15.2 32.79,32.244 33.528,31.506 32.765,31.506 ; 32.765,31.506 32.765,30.769 C6.2@32.79,30.744 ; C6.2@32.79,30.744 33.529,31.482
NetC7_1: C7.1 IC4.5 R26.2 | length 3.8
  Top Layer w0.5: IC4.5 26.199,28.095 26.703,28.095 27.741,27.056 27.838,27.056 C7.1 R26.2
NetC8_2: C8.2 DD4.2 R22.2 | length 5
  Top Layer w0.5: DD4.2 34.256,27.606 33.51,27.606 ; 32.765,27.674 R22.2 32.79,28.394 33.015,28.169 33.015,28.1 33.51,27.606 ; 32.765,27.674 C8.2 32.79,26.954 33.442,27.606 ; 32.765,27.674 33.374,27.674 33.442,27.606 ; 33.442,27.606 33.51,27.606
NetD1_A: D1.A R21.1 | length 2.3
  Top Layer w0.5: D1.A 11.556,28.02 11.556,30.205 R21.1
NetD1_C: D1.C Q7.1 R35.2 TP2.1 | length 21.6
  Top Layer w0.5: 6.962,20.625 10.132,20.625 11.846,22.338 v1@11.846,25.24 ; Q7.1 8.05,27.95 8.965,27.035 8.965,26.005 9.73,25.24 11.614,25.24 11.791,25.417 v1(11.846,25.417) ; v1(13.976,26.094) 14.03,26.094 14.136,25.988 14.776,25.988 15.466,26.679 15.466,27.306 D1.C@15.768,27.608 ; D1.C D1.C@15.768,27.608 ; R35.2 17.124,27.273 16.103,27.273 D1.C@15.768,27.608
  Bottom Layer w0.5: v1(11.846,25.417) 12.416,25.988 13.817,25.988 13.922,26.094 v1(13.976,26.094)
NetDD1_6: DD1.6 Q1.1 | length 2.5
  Top Layer w0.5: DD1.6 Q1.1
NetDD2_6: DD2.6 Q2.1 | length 2.5
  Top Layer w0.5: DD2.6 Q2.1
NetDD3_6: DD3.6 Q3.1 | length 2.5
  Top Layer w0.5: DD3.6 Q3.1
NetDD4_6: DD4.6 Q4.1 | length 2.5
  Top Layer w0.5: DD4.6 Q4.1
NetFET1_1: FET1.1 FET3.1 FET5.1 FET7.1 FET9.1 Q7.3 R32.2 R36.2 | length 109.1
  Top Layer w0.5: v1(7.985,5.25) 8.408,5.25 ; FET1.1 8.75,4.854 ; v1(10.084,26.094) 10.092,26.102 10.092,26.547 ; FET3.1 16.214,4.61 ; R36.2 17.524,25.234 13.275,25.234 12.218,26.291 ; FET5.1 23.678,4.61 ; FET7.1 31.101,4.61 ; FET9.1 38.501,4.61 ; R32.2 44.37,6.27 43.35,5.25 39.182,5.25 ; 8.408,5.25 8.75,4.908 8.75,4.854 ; 8.408,5.25 9.146,5.25 ; 8.75,4.854 9.146,5.25 ; 9.146,5.25 15.574,5.25 ; 10.092,26.547 10.092,26.992 Q7.3 10.15,27 10.856,26.294 ; 10.092,26.547 10.345,26.294 10.856,26.294 ; 10.856,26.294 12.215,26.294 12.218,26.291 ; 10.856,26.294 10.859,26.291 12.218,26.291 ; 15.574,5.25 16,5.25 ; 15.574,5.25 16.214,4.61 ; 16,5.25 16.214,5.25 16.896,5.25 ; 16,5.25 16.214,5.036 16.214,4.61 ; 16.214,4.61 16.256,4.61 16.896,5.25 ; 16.896,5.25 23.038,5.25 ; 23.038,5.25 23.678,5.25 ; 23.038,5.25 23.678,4.61 ; 23.678,4.61 23.72,4.61 24.36,5.25 ; 23.678,4.61 23.678,5.25 ; 23.678,5.25 24.36,5.25 ; 24.36,5.25 30.461,5.25 ; 30.461,5.25 31.101,5.25 ; 30.461,5.25 31.101,4.61 ; 31.101,4.61 31.142,4.61 31.782,5.25 ; 31.101,4.61 31.101,5.25 ; 31.101,5.25 31.782,5.25 ; 31.782,5.25 37.861,5.25 ; 37.861,5.25 38.501,5.25 ; 37.861,5.25 38.501,4.61 ; 38.501,4.61 38.542,4.61 39.182,5.25 ; 38.501,4.61 38.501,5.25 ; 38.501,5.25 39.182,5.25
  Bottom Layer w0.5: v1(7.985,5.25) 7.985,5.297 7.054,6.228 7.054,23.061 10.084,26.091 v1(10.084,26.094)
NetFET1_2: FET1.2 FET3.2 FET5.2 FET7.2 FET9.2 P-.PACK- pad.3@9.15,7.05 pad.3@12.15,7.05 pad.3@13.15,7.05 pad.3@16.6,7.075 pad.3@19.6,7.075 pad.3@20.6,7.075 pad.3@23.95,7.25 pad.3@26.95,7.25 pad.3@27.95,7.25 pad.3@31.425,7.3 pad.3@34.425,7.3 pad.3@35.425,7.3 pad.3@38.75,7.338 pad.3@41.75,7.338 pad.3@42.75,7.338 pad.3@45.75,7.338 pad.4@10.15,7.05 pad.4@17.6,7.075 pad.4@24.95,7.25 pad.4@32.425,7.3 pad.4@39.75,7.338 pad.4@46.75,7.338 pad.5@11.17,7.05 pad.5@18.62,7.075 pad.5@25.97,7.25 pad.5@33.445,7.3 pad.5@40.77,7.338 pad.5@47.77,7.338 pad.6@9.15,7.8 pad.6@12.15,7.8 pad.6@13.15,7.8 pad.6@16.6,7.825 pad.6@19.6,7.825 pad.6@20.6,7.825 pad.6@23.95,8 pad.6@26.95,8 pad.6@27.95,8 pad.6@31.425,8.05 pad.6@34.425,8.05 pad.6@35.425,8.05 pad.6@38.75,8.088 pad.6@41.75,8.088 pad.6@42.75,8.088 pad.6@45.75,8.088 pad.7@10.15,7.8 pad.7@17.6,7.825 pad.7@24.95,8 pad.7@32.425,8.05 pad.7@39.75,8.088 pad.7@46.75,8.088 pad.8@11.17,7.8 pad.8@18.62,7.825 pad.8@25.97,8 pad.8@33.445,8.05 pad.8@40.77,8.088 pad.8@47.77,8.088 pad.9@9.15,8.55 pad.9@12.15,8.55 pad.9@13.15,8.55 pad.9@16.6,8.575 pad.9@19.6,8.575 pad.9@20.6,8.575 pad.9@23.95,8.75 pad.9@26.95,8.75 pad.9@27.95,8.75 pad.9@31.425,8.8 pad.9@34.425,8.8 pad.9@35.425,8.8 pad.9@38.75,8.838 pad.9@41.75,8.838 pad.9@42.75,8.838 pad.9@45.75,8.838 pad.10@10.15,8.55 pad.10@17.6,8.575 pad.10@24.95,8.75 pad.10@32.425,8.8 pad.10@39.75,8.838 pad.10@46.75,8.838 pad.11@11.17,8.55 pad.11@18.62,8.575 pad.11@25.97,8.75 pad.11@33.445,8.8 pad.11@40.77,8.838 pad.11@47.77,8.838 pad.12@9.15,9.3 pad.12@12.15,9.3 pad.12@13.15,9.3 pad.12@16.6,9.325 pad.12@19.6,9.325 pad.12@20.6,9.325 pad.12@23.95,9.5 pad.12@26.95,9.5 pad.12@27.95,9.5 pad.12@31.425,9.55 pad.12@34.425,9.55 pad.12@35.425,9.55 pad.12@38.75,9.588 pad.12@41.75,9.588 pad.12@42.75,9.588 pad.12@45.75,9.588 pad.13@10.15,9.3 pad.13@17.6,9.325 pad.13@24.95,9.5 pad.13@32.425,9.55 pad.13@39.75,9.588 pad.13@46.75,9.588 pad.14@11.17,9.3 pad.14@18.62,9.325 pad.14@25.97,9.5 pad.14@33.445,9.55 pad.14@40.77,9.588 pad.14@47.77,9.588 pad.15@9.15,10.05 pad.15@9.15,10.8 pad.15@12.15,10.05 pad.15@12.15,10.8 pad.15@13.15,10.05 pad.15@13.15,10.8 pad.15@16.6,10.075 pad.15@16.6,10.825 pad.15@19.6,10.075 pad.15@19.6,10.825 pad.15@20.6,10.075 pad.15@20.6,10.825 pad.15@23.95,10.25 pad.15@23.95,11 pad.15@26.95,10.25 pad.15@26.95,11 pad.15@27.95,10.25 pad.15@27.95,11 pad.15@31.425,10.3 pad.15@31.425,11.05 pad.15@34.425,10.3 pad.15@34.425,11.05 pad.15@35.425,10.3 pad.15@35.425,11.05 pad.15@38.75,10.338 pad.15@38.75,11.088 pad.15@41.75,10.338 pad.15@41.75,11.088 pad.15@42.75,10.338 pad.15@42.75,11.088 pad.15@45.75,10.338 pad.15@45.75,11.088 pad.16@10.15,10.05 pad.16@10.15,10.8 pad.16@17.6,10.075 pad.16@17.6,10.825 pad.16@24.95,10.25 pad.16@24.95,11 pad.16@32.425,10.3 pad.16@32.425,11.05 pad.16@39.75,10.338 pad.16@39.75,11.088 pad.16@46.75,10.338 pad.16@46.75,11.088 pad.17@11.17,10.05 pad.17@11.17,10.8 pad.17@18.62,10.075 pad.17@18.62,10.825 pad.17@25.97,10.25 pad.17@25.97,11 pad.17@33.445,10.3 pad.17@33.445,11.05 pad.17@40.77,10.338 pad.17@40.77,11.088 pad.17@47.77,10.338 pad.17@47.77,11.088 Q7.2 R35.1 R36.1 | length 45.2
  Top Layer w0.5: v1(6.84,26.733) 6.878,26.694 6.878,26.568 7.246,26.2 7.85,26.2 Q7.2 ; R35.1 17.356,28.541 17.978,28.541 ; v1@18.447,28.127 v1(18.392,28.127) ; R36.1@19.093,28.278 R36.1@19.296,28.481 ; v1(19.28,24.043) v1(19.282,21.886) v1(19.282,21.886) ; R36.1@19.306,28.541 R36.1 R36.1@19.318,28.503 ; 17.978,28.541 19.281,28.541 R36.1@19.318,28.503 ; 17.978,28.541 v1(18.392,28.127) ; v1(18.392,28.127) 18.392,28.181 18.693,28.481 R36.1@19.296,28.481 ; R36.1@19.296,28.481 R36.1@19.318,28.503
  Bottom Layer w0.5: v1(6.84,26.733) 9.19,29.083 17.436,29.083 18.431,28.088 20.2,26.319 20.2,24.964 v1(19.28,24.043) ; 14.595,13.224 14.595,12.74 ; pad.15@16.6,10.825 15.75,10.825 14.595,11.98 ; v1(19.282,21.886) 16.309,21.886 14.595,20.172 14.595,12.74 ; 14.595,11.98 15.134,11.98 14.595,12.519 ; 14.595,11.98 14.005,11.98 14.595,12.57 ; 14.595,11.98 14.595,12.519 ; 14.595,12.519 14.595,12.57 ; 14.595,12.57 14.595,12.74
NetFET1_3: FET1.3 FET2.3 FET3.3 FET4.3 FET5.3 FET6.3 FET7.3 FET8.3 FET9.3 FET10.3 pad.2@9.75,28.199 pad.2@10.596,24.324 R31.1 | length 114.6
  Top Layer w0.5: FET2.3 FET2.3@8.689,23.768 ; pad.2@9.75,28.199 9.775,28.447 9.775,29.458 R31.1 ; FET1.3 13.322,1.043 13.615,0.75 20.416,0.75 ; v1(14.999,24.08) 15.979,24.08 16.214,23.845 FET4.3@16.214,23.24 ; FET3.3 20.786,1.12 ; 21.5,0.75 21.156,0.75 ; v1(22.434,23.33) 23.443,23.33 23.678,23.095 FET6.3 ; FET6.3@23.678,23.24 23.913,23.475 23.913,24.58 24.313,24.98 30.694,24.98 ; FET5.3 28.25,1.12 ; FET8.3 31.1,24.58 ; FET7.3 35.673,1.12 ; FET10.3 38.229,23.075 38.229,24.571 37.82,24.98 31.515,24.98 ; FET9.3 42.838,2.625 42.838,1.12 42.468,0.75 36,0.75 ; FET2.3@8.689,23.768 8.689,23.845 8.924,24.08 9.251,24.08 ; FET2.3@8.689,23.768 8.835,23.914 8.946,24.025 9.098,24.052 cw(c9.189,23.561) 9.101,24.053 9.251,24.08 ; 9.251,24.08 10.298,24.08 pad.2@10.53,24.312 ; pad.2@10.53,24.312 10.596,24.324 10.542,24.324 pad.2@10.53,24.312 ; 20.416,0.75 20.87,0.75 ; 20.416,0.75 20.786,1.12 ; 20.786,1.12 21.156,0.75 ; 20.786,1.12 20.786,0.834 20.87,0.75 ; 20.87,0.75 21.156,0.75 ; 21.156,0.75 v1(22.344,0.75) 27.88,0.75 ; 27.88,0.75 28.25,0.75 ; 27.88,0.75 28.25,1.12 ; 28.25,0.75 28.62,0.75 ; 28.25,0.75 28.25,1.12 ; 28.25,1.12 28.62,0.75 ; 28.62,0.75 35.303,0.75 ; 30.694,24.98 31.072,24.98 ; 30.694,24.98 31.094,24.58 31.1,24.58 ; 31.072,24.98 31.515,24.98 ; 31.072,24.98 31.1,24.952 31.1,24.58 ; 31.1,24.58 31.115,24.58 31.515,24.98 ; 35.303,0.75 35.673,0.75 ; 35.303,0.75 35.673,1.12 ; 35.673,0.75 36,0.75 ; 35.673,0.75 35.673,1.077 ; 35.673,1.077 36,0.75 ; 35.673,1.077 35.673,1.12
  Bottom Layer w0.5: pad.2@9.75,28.199 10.792,27.157 10.938,27.011 10.938,24.785 ; v1(22.344,0.75) 22.344,22.686 ; v1@22.344,23.099 22.344,22.686 ; v1(22.434,23.33) 22.38,23.33 22.117,23.067 21.963,23.067 ; pad.2@10.596,24.324 cw(c10.999,24.028) 10.597,24.326 10.938,24.785 ; pad.2@10.596,24.324 10.634,24.286 pad.2@10.689,24.286 ; pad.2@10.596,24.324 10.65,24.324 pad.2@10.689,24.286 ; pad.2@10.689,24.286 10.894,24.08 11.206,24.08 ; pad.2@10.689,24.286 11,24.286 11.206,24.08 ; 10.938,24.785 11.518,24.205 11.518,24.08 ; 11.206,24.08 11.518,24.08 ; 11.518,24.08 v1(14.999,24.08) 15.053,24.08 16.066,23.067 21.963,23.067 ; 21.963,23.067 22.344,22.686
NetFET2_1: FET2.1 FET4.1 FET6.1 FET8.1 FET10.1 pad.2@18.338,29.483 Q5.1 Q5.3 Q6.3 R28.1 R29.2 R33.2 R34.1 TP1.1 | length 91.7
  Top Layer w0.5: TP1.1 5.8,23.464 5.8,28.124 6.4,28.724 ; R34.1 R34.1@6.635,34.25 ; v1@7.093,29.417 6.4,30.11 ; R29.2 Q5.1 8.45,35.993 8.3,36.143 8.3,36.193 7.55,36.943 Q5.3 6.4,34.65 6.41,34.64 6.41,34.475 R34.1@6.635,34.25 ; FET2.1@13.261,23.24 FET2.1 13.261,21.043 13.554,20.75 20.3,20.75 ; pad.2@18.338,29.483 18.338,29.537 18.693,29.892 18.693,29.993 R28.1@18.918,30.218 ; v1(22.012,24.357) 21.958,24.357 21.681,24.08 21.021,24.08 20.786,23.845 FET4.1 20.786,21.236 ; FET6.1@28.25,23.24 FET6.1 28.25,21.236 ; FET8.1@35.672,23.24 FET8.1 35.672,21.236 ; 36,20.75 35.672,20.75 ; R33.2@41.5,25.25 R33.2 41.525,24.291 42.001,23.815 42.801,23.815 43.036,23.58 FET10.1 43.036,21.236 42.55,20.75 36.158,20.75 35.672,21.236 ; 6.4,28.724 6.4,29.417 ; 6.4,28.724 v1(7.055,29.378) 7.016,29.417 6.4,29.417 ; 6.4,29.417 6.4,30.11 ; 6.4,30.11 Q6.3 6.4,34.015 R34.1@6.635,34.25 ; 20.3,20.75 20.659,20.75 ; 20.3,20.75 20.786,21.236 ; 20.659,20.75 21.272,20.75 ; 20.659,20.75 20.786,20.877 20.786,21.236 ; 20.786,21.236 21.272,20.75 ; 21.272,20.75 27.764,20.75 ; 27.764,20.75 28.25,20.75 ; 27.764,20.75 28.25,21.236 ; 28.25,20.75 28.736,20.75 ; 28.25,20.75 28.25,21.236 ; 28.25,21.236 28.736,20.75 ; 28.736,20.75 35.186,20.75 ; 35.186,20.75 35.672,20.75 ; 35.186,20.75 35.672,21.236 ; 35.672,20.75 35.672,21.236
  Bottom Layer w0.5: v1(7.055,29.378) 7.513,29.837 17.93,29.837 18.284,29.483 18.338,29.483 18.377,29.444 18.851,29.444 22.05,26.245 22.05,24.395 v1(22.012,24.357)
NetIC1_1: IC1.1 R4.1 | length 1.4
  Top Layer w0.5: R4.1 22.274,39.989 23.414,39.989 IC1.1
NetIC1_3: IC1.3 R6.1 | length 1.5
  Top Layer w0.5: R6.1 22.193,38.268 22.982,38.268 23.162,38.088 IC1.3
NetIC2_1: IC2.1 R10.1 | length 1.5
  Top Layer w0.5: R10.1 22.293,36.158 23.108,36.158 23.164,36.213 IC2.1
NetIC2_3: IC2.3 R13.1 | length 1.4
  Top Layer w0.5: R13.1 22.251,34.31 23.417,34.31 IC2.3
NetIC3_1: IC3.1 R17.1 | length 1.5
  Top Layer w0.5: R17.1 22.111,32.4 22.3,32.589 23.11,32.589 23.164,32.643 IC3.1
NetIC3_3: IC3.3 R20.1 | length 1.5
  Top Layer w0.5: R20.1 22.293,30.778 23.122,30.778 23.162,30.738 IC3.3
NetIC4_1: IC4.1 R24.1 | length 1.4
  Top Layer w0.5: R24.1 22.343,29.028 23.149,29.028 23.164,29.043 IC4.1
NetIC4_3: IC4.3 R27.1 | length 1.8
  Top Layer w0.5: R27.1@22.325,27.778 R27.1 22.1,27.528 22.325,27.303 22.997,27.303 23.162,27.138 IC4.3
NetQ1_3: Q1.3 R3.2 | length 1.8
  Top Layer w0.5: Q1.3 42.001,39.594 42.501,39.094 42.901,39.094 43.126,38.869 R3.2
NetQ2_3: Q2.3 R9.2 | length 1.8
  Top Layer w0.5: Q2.3 42.001,35.494 42.501,34.994 42.901,34.994 43.126,34.769 R9.2
NetQ3_3: Q3.3 R16.2 | length 1.8
  Top Layer w0.5: Q3.3 42.001,31.494 42.501,30.994 42.901,30.994 43.126,30.769 R16.2
NetQ4_3: Q4.3 R23.2 | length 1.8
  Top Layer w0.5: Q4.3 42.001,27.594 42.501,27.094 42.901,27.094 43.126,26.869 R23.2
NetQ6_1: Q6.1 R30.1 R31.2 | length 3.1
  Top Layer w0.5: R31.2 8.275,29.483 8.5,29.708 Q6.1 8.516,30.859 10.084,30.859 R30.1
NetR1_1: R1.1 R7.2 T3.3 | length 2.8
  Top Layer w0.5: R1.1 R7.2 11.593,37.168 11.818,36.943 12.343,36.943 T3.3
NetR1_2: R1.2 T1.3 | length 1.6
  Top Layer w0.5: R1.2 11.788,39.748 12.288,39.748 T1.3
NetR4_2: pad.2@15.793,38.143 pad.2@20.564,40.817 R4.2 T1.1 | length 8.6
  Top Layer w0.5: T1.1 15.055,38.181 15.755,38.181 pad.2@15.793,38.143 ; pad.2@20.564,40.817 20.572,40.822 20.572,39.786 R4.2
  Bottom Layer w0.5: pad.2@15.793,38.143 15.831,38.181 15.831,38.887 16.637,39.693 19.443,39.693 pad.2@20.564,40.817
NetR6_2: pad.2@16.945,38.793 pad.2@21.3,37.275 R6.2 T2.1 | length 7.3
  Top Layer w0.5: pad.2@16.945,38.793 16.983,38.755 17.406,38.755 T2.1 ; R6.2 20.572,38.39 20.572,37.981 20.718,37.835 ; 20.718,37.835 20.721,37.831 pad.2@21.3,37.275
  Bottom Layer w0.5: pad.2@16.945,38.793 17.93,37.808 18.14,37.808 20.52,37.835 20.727,37.835 20.873,37.693 pad.2@21.3,37.275
NetR7_1: R7.1 R14.2 T5.3 | length 2.9
  Top Layer w0.5: R7.1 R14.2 11.593,34.418 11.818,34.193 12.368,34.193 T5.3
NetR10_2: pad.2@15.818,35.533 pad.2@20.205,36.943 R10.2 T3.1 | length 7.6
  Top Layer w0.5: T3.1 14.743,35.743 14.943,35.743 15.208,35.478 15.709,35.478 15.764,35.533 pad.2@15.818,35.533 ; pad.2@20.205,36.943 20.205,36.889 20.318,36.776 20.318,36.158 20.543,35.933 R10.2
  Bottom Layer w0.5: pad.2@15.818,35.533 15.837,35.731 15.855,35.909 15.999,36.053 17.084,36.943 pad.2@20.205,36.943
NetR12_1: R12.1 R19.2 T4.2 | length 2.5
  Top Layer w0.5: T4.2 17.718,37.143 18.868,37.143 R19.2 R12.1
NetR12_2: R12.2 T2.2 | length 1.3
  Top Layer w0.5: T2.2 17.718,39.843 18.868,39.843 R12.2
NetR13_2: R13.2 T4.1 | length 6.8
  Top Layer w0.5: v1(16.835,35.443) 16.889,35.443 17.189,35.743 17.618,35.743 T4.1 ; R13.2 20.593,34.493 20.818,34.268 20.818,34.243 R13.2@21.033,34.028
  Bottom Layer w0.5: v1(16.835,35.443) 17.035,35.643 19.154,35.643 20.807,34.288 20.951,34.144 20.969,33.966 v1(20.991,33.741)
NetR14_1: R14.1 R21.2 T7.3 | length 2.8
  Top Layer w0.5: R14.1 R21.2 11.593,31.718 11.818,31.493 12.318,31.493 T7.3
NetR17_2: pad.2@15.018,32.55 pad.2@20.151,33.193 R17.2 T5.1 | length 8.9
  Top Layer w0.5: T5.1 14.768,32.993 14.768,32.854 15.018,32.604 pad.2@15.018,32.55 ; pad.2@20.151,33.193 20.189,33.155 20.189,32.736 20.525,32.4 R17.2
  Bottom Layer w0.5: pad.2@15.018,32.55 14.98,32.588 14.98,32.73 14.968,32.741 14.968,33.76 15.701,34.493 18.918,34.493 20.051,33.36 20.051,33.347 20.151,33.247 pad.2@20.151,33.193
NetR19_1: R19.1 R25.2 T6.2 | length 2.5
  Top Layer w0.5: T6.2 17.743,34.393 18.868,34.393 R25.2 R19.1
NetR20_2: R20.2 T6.1 | length 7.6
  Top Layer w0.5: v1(16.84,32.4) 16.878,32.438 17.088,32.438 T6.1 ; R20.2 20.593,31.003 20.818,30.778 20.818,30.279 21.05,30.047 v1(21.05,29.993)
  Bottom Layer w0.5: v1(16.84,32.4) 16.878,32.362 17.02,32.362 17.038,32.343 18.618,32.343 20.868,30.093 20.896,30.093 20.996,29.993 v1(21.05,29.993)
NetR24_2: pad.2@12.968,28.02 pad.2@19.318,25.803 R24.2 T7.1 | length 14.3
  Top Layer w0.5: pad.2@12.968,28.02 12.968,28.643 T7.1 T7.1@14.667,30.293 ; pad.2@19.318,25.803 19.343,25.828 19.899,25.828 20.417,26.346 20.417,28.602 R24.2
  Bottom Layer w0.5: pad.2@12.968,28.02 13.022,28.02 13.129,28.127 16.905,28.127 19.128,25.903 19.164,25.903 19.264,25.803 pad.2@19.318,25.803
NetR25_1: R25.1 R28.2 T8.2 | length 2.5
  Top Layer w0.5: T8.2 17.743,31.693 18.868,31.693 R28.2 R25.1
NetR27_2: R27.2 T8.1 | length 15.3
  Top Layer w0.5: v1(14.005,27.273) 14.005,28.614 14.93,29.539 16.641,29.539 17.445,30.343 T8.1 ; v1(18.415,24.917) 18.447,24.949 21.072,24.949 21.875,25.752 21.875,25.828 R27.2
  Bottom Layer w0.5: v1(14.005,27.273) 16.06,27.273 v1(18.415,24.917)
pads on no net: DD1.1 DD1.4 DD1.5 DD2.1 DD2.4 DD2.5 DD3.1 DD3.4 DD3.5 DD4.1 DD4.4 DD4.5 IC1.4 IC2.4 IC3.4 IC4.4

## Polygon pours and split planes (outlines as drawn)
no net on Top Layer "NONET_L01_P002" (solid, pour order 2): 0,43.1 48.9,43.1 48.9,0 0,0
no net on Bottom Layer "NONET_L02_P000" (solid, pour order 0): 0,43.1 48.9,43.1 48.9,0 0,0

## Keep-outs
Keep-Out Layer:
  the board outline again, w0.1

## Other copper
Top Layer:
  region net Net16.8V_TP: 42.534,25.715 42.544,25.725 43.528,25.725 45.254,27.45 48.225,27.45 48.225,24.875 48.128,24.778 42.528,24.778
  region net Net16.8V_TP: 48.2,38.05 45.395,38.05 43.601,39.844 42.651,39.844 42.651,40.444 41.595,41.5 32.25,41.5 31.766,40.888 31.766,40.46 30.774,40.46 30.765,41.965 31.475,42.675 48.2,42.675
  region net Net16.8V_TP: 43.895,24.427 43.525,24.797 43.555,24.827 48.177,24.827 48.225,24.875 48.225,23.297 48.018,23.09 43.895,23.09
  region net Net16.8V_TP: 45.225,25.125 45,25.35 45,42.675 48.3,42.675 48.5,42.475 48.5,23.572 48.122,23.193 47.4,23.193
  region net Net0V_TP: 0.508,4.231 0.508,6.008 3.031,8.531 7.052,8.531 7.048,1.248 3.498,1.248
  region net Net0V_TP: 3,11.526 3,8.275 6.796,8.275 7.054,8.533 7.054,14.675
  region net Net0V_TP: 4.125,16.95 4.45,17.275 4.725,17.275 5.1,16.9
  region net Net16.8V_TP: 14.395,40.139 14.395,39.54 14.824,39.543 15.525,38.841 16.117,38.841 16.117,39.441 18.345,41.674 27.775,41.674 29.148,40.301 29.148,39.31 30.131,39.31 31.611,40.79 31.611,42.675 16.932,42.675
  region net Net0V_TP: 3,10.569 3,16.95 6.729,16.95 9,18.025 9.372,17.653 9.193,14.095
  region net NetFET1_2: 8.512,12.475 8.512,6.205 8.522,6.215 43.311,6.215 43.311,12.477 43.32,12.485
  region net NetFET1_2: 45.267,20.7 48.25,20.7 48.25,6.215 45.25,6.215
  region net Net0V_TP: 8.483,19.483 8.483,13.213 8.493,13.223 43.282,13.223 43.282,19.485 43.29,19.493
Bottom Layer:
  region net Net16.8V_TP: 48.5,23.572 48.018,23.09 45.246,23.09 45,23.336 45,42.28 45.395,42.675 48.3,42.675 48.5,42.475
  region net Net0V_TP: 30.851,19.485 30.851,13.22 36.458,13.22 36.458,19.494
  region net Net8.4V_TP: 0.4,20.5 0.4,30 3.175,32.775 13.673,32.775 14.635,31.618 13.508,30.482 6.528,30.482 4.4,28.133 4.4,20.5
  region net Net12.6V_TP: 20.252,41.674 18.924,40.346 15.694,40.346 15.663,40.377 16.7,41.414 16.7,41.919
  region net Net12.6V_TP: 14.393,38.843 14.804,39.254 17.05,41.5 15.055,41.5 14.393,40.838
  region net Net12.6V_TP: 13.143,37.193 13.143,38.893 12.723,39.253 9.225,39.253 9.225,42.675 23.97,42.675 25.145,41.5 25.145,40.301 22.024,40.301 20.825,41.5 15.188,41.5 14.393,39.193 14.393,37.193
  region net Net12.6V_TP: 0.5,42.675 0.5,39.255 9.22,39.255 9.226,42.675
  region net Net0V_TP: 15.47,19.485 15.47,13.22 21.025,13.22 21.7,13.22 21.7,19.485
  region net NetFET1_2: 8.512,12.475 8.512,6.21 15.965,6.21 15.965,12.487
  region net NetFET1_2: 15.965,12.46 15.965,6.194 21.7,6.194 21.7,12.469
  region net NetFET1_2: 22.95,12.475 22.95,6.211 30.845,6.211 30.852,12.488
  region net NetFET1_2: 30.852,12.478 30.852,6.213 36.458,6.213 36.458,12.487
  region net Net0V_TP: 8.448,19.471 8.448,13.206 14.005,13.206 14.005,19.471
  region net Net0V_TP: 22.95,19.481 22.95,13.216 30.843,13.216 30.851,19.493
  region net Net0V_TP: 38.215,19.481 38.215,13.216 43.275,13.216 43.286,13.227 43.286,19.489
  region net NetFET1_2: 38.251,12.477 48.25,12.477 48.25,6.215 38.252,6.215

## Silkscreen, mask and mechanical layers (free items; w line width, h text height)
Top Overlay:
  lines w0.1: 4.8,25.463 4.915,25.463 5.46,24.917 17.029,24.917 17.543,25.432 17.938,25.432 18.344,25.432 18.518,25.432 22.598,25.432 22.587,25.442 22.587,40.817 18,40.817 18,25.494 ; 5.35,40.672 12.275,40.672 12.275,29.586 12.257,29.568 10.945,29.568 10.929,29.583 10.929,40.672 10.934,40.667 12.268,40.667 ; 2.1,24.6 2.1,33 4.865,33 4.8,32.935 4.8,24.6 2.1,24.6 ; 4.45,36.525 5.375,36.525 5.35,36.55 5.35,42.025 4.45,42.025 4.45,36.525
  lines w0.254: -2.508,1.524 -2,0 ; -2.508,41.576 -2,43.1 ; -2.254,0 -1.746,0 ; -2.254,43.1 -1.746,43.1 ; -2,15.177 -2,0 ; -2,27.923 -2,43.1 ; -1.492,1.524 -2,0 ; -1.492,41.576 -2,43.1 ; 0,44.846 0,45.354 ; 1.524,44.592 0,45.1 ; 1.524,45.608 0,45.1 ; 17.95,45.1 0,45.1 ; 30.95,45.1 48.9,45.1 ; 47.376,44.592 48.9,45.1 ; 47.376,45.608 48.9,45.1 ; 48.9,44.846 48.9,45.354
  text "48.9 (mm)" at 18.204,44.186 h1.52
  text "43.1 (mm)" at -1.086,15.431 h1.52 r90
Top Solder:
  region: 45.211,42.275 48.2,42.275 48.2,25.15 48.225,25.125 45.225,25.125
Bottom Solder:
  region: 30.851,12.479 30.852,12.478 30.852,6.217 35.911,6.217 35.919,6.225 35.919,12.487
  region: 23.428,12.477 23.429,12.476 23.429,6.215 28.488,6.215 28.496,6.223 28.496,12.485
  region: 15.964,12.461 15.965,12.46 15.965,6.199 21.024,6.199 21.032,6.207 21.032,12.469
  region: 8.511,12.476 8.512,12.475 8.512,6.214 13.571,6.214 13.579,6.222 13.579,12.484
  region: 8.447,19.472 8.448,19.471 8.448,13.21 13.507,13.21 13.515,13.218 13.515,19.48
  region: 15.964,19.486 15.965,19.485 15.965,13.224 21.024,13.224 21.032,13.232 21.032,19.494
  region: 23.428,19.483 23.429,19.482 23.429,13.221 28.488,13.221 28.496,13.229 28.496,19.491
  region: 30.85,19.486 30.851,19.485 30.851,13.224 35.91,13.224 35.918,13.232 35.918,19.494
  region: 38.214,19.482 38.215,19.481 38.215,13.22 43.274,13.22 43.282,13.228 43.282,19.49
  region: 38.251,12.477 38.252,12.476 38.252,6.215 43.311,6.215 43.32,6.223 43.32,12.485